# EAGLE board light_triggger_attiny44 (EAGLE 6.4)
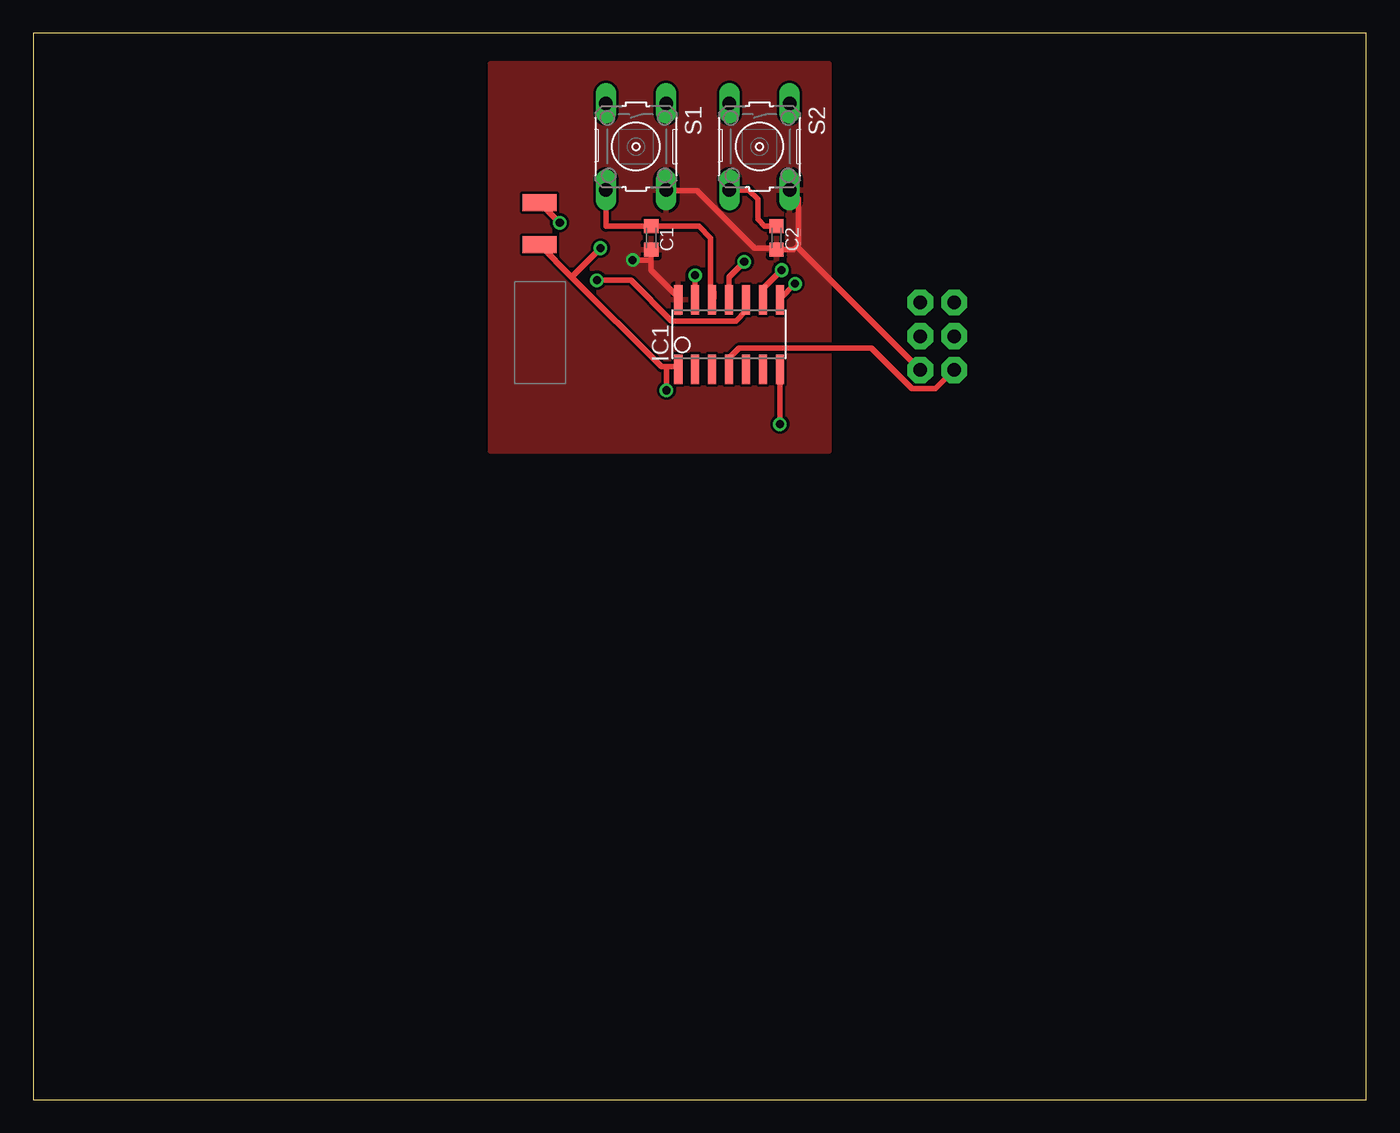
[diagram p0: board, top side]
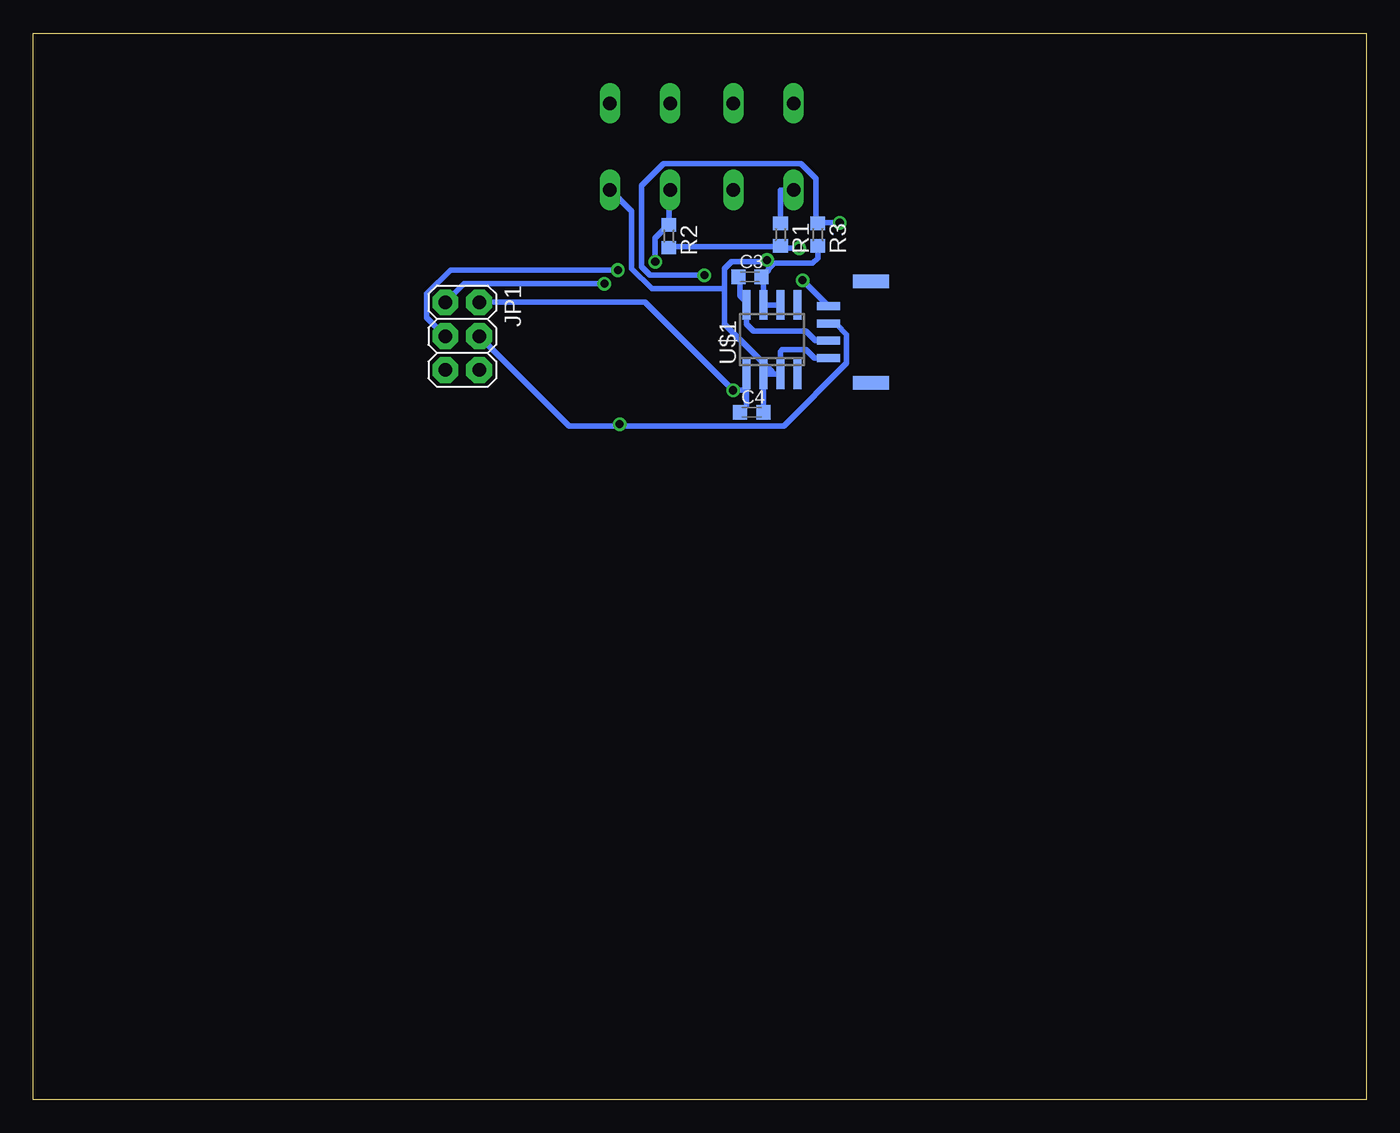
[diagram p1: board, bottom side, seen from below]

Size 100 x 80 mm. Coordinates in mm from the lower left corner, seen from the top.
Outline: 0,0 100,0 100,80 0,80 0,0
Copper layers (1*16): Top 0.035mm / dielectric 1.5mm / Bottom 0.035mm
Design rules "default *": minimum track width 16mil, minimum drill 24mil, track to track 8mil, track to pad 8mil, pad to pad 8mil, via to via 8mil, smd to smd 8mil, copper to edge 40mil, drill to drill 8mil, minimum pad ring 10mil, minimum via ring 8mil, stop-mask expansion 4mil, vias tented up to drill 0mil, thermal gap 10mil

## Footprints (pad centres in the part's own frame; a part is rotated, then mirrored left to right if it is on the bottom)
C0603K = smd 1.05 x 1.08: 1 -0.875,0; 2 0.875,0
SOIC14 = smd 0.61 x 2.21: 1 -3.81,-2.603; 2 -2.54,-2.603; 3 -1.27,-2.603; 4 0,-2.603; 5 1.27,-2.603; 6 2.54,-2.603; 7 3.81,-2.603; 8 3.81,2.603; 9 2.54,2.603; 10 1.27,2.603; 11 0,2.603; 12 -1.27,2.603; 13 -2.54,2.603; 14 -3.81,2.603
2X03 = drill 1.016 pad 1.93 octagon: 1 -2.54,-1.27; 2 -2.54,1.27; 3 0,-1.27; 4 0,1.27; 5 2.54,-1.27; 6 2.54,1.27
R0603 = smd 1 x 1.1: 1 -0.85,0; 2 0.85,0
B3F-10XX = drill 1.016 long: 1 -3.251,2.261; 2 3.251,2.261; 3 -3.251,-2.261; 4 3.251,-2.261
LM78L05 = smd 0.6 x 2.2: 1 -1.905,-2.6; 2 -0.635,-2.6; 3 0.635,-2.6; 4 1.905,-2.6; 5 1.905,2.6; 6 0.635,2.6; 7 -0.635,2.6; 8 -1.905,2.6
PHOTOTRANSITOR(OP525DA) = smd 2.54 x 1.27: P$1 -0.635,5.08; P$2 -0.635,1.905
SM04B-GHS-TB = smd 0.6 x 1.7: GND 2.42,4.66; PWMLED 5.02,4.66; TIMLED 6.32,4.66; VIN 3.72,4.66 | smd 1 x 2.7: P$2 0.57,1.46; P$4 8.17,1.46

## Placement (x,y rotation side)
C1  [C0603K]  46.35,64.64 270 top
C2  [C0603K]  55.75,64.64 270 top
C3  [C0603K]  46.23,61.72 0 bottom
C4  [C0603K]  46.1,51.56 0 bottom
IC1  ATTINY24/44/84-SSU  [SOIC14]  52.2,57.4 0 top
JP1  [2X03]  67.82,57.28 270 bottom
R1  [R0603]  43.94,64.9 270 bottom
R2  [R0603]  52.32,64.77 270 bottom
R3  [R0603]  41.15,64.9 270 bottom
S1  [B3F-10XX]  45.21,71.5 270 top
S2  [B3F-10XX]  54.48,71.5 270 top
U$1  LM78L05  [LM78L05]  44.58,57.02 0 bottom
U$2  0P525DA  [PHOTOTRANSITOR(OP525DA)]  37.34,69.22 180 top
U$3  SM04B-GHS-TB  [SM04B-GHS-TB]  35.69,53.21 90 bottom

## Library data of the parts
C1-C4 R1-R3 = resistor
IC1 = attiny24_44_84
JP1 = pinhead
S1 S2 = switch-omron; MPN: B3F-1000; OC_FARNELL: 176432; OC_NEWARK: 36M3542
U$1 = LM78L05
U$2 = OPTEK
U$3 = Wire-to-Board

## Nets
GND: C1.2 C2.2 C3.2 C4.2 IC1.14 JP1.6 R3.2 S1.2 S2.2 U$1.2 U$1.3 U$1.6 U$1.7 U$3.GND
MISO: IC1.8 JP1.1
MOSI: IC1.7 JP1.4 U$3.PWMLED
N$1: IC1.13 R3.1 U$2.P$2
N$2: IC1.10 U$3.TIMLED
N$3: C1.1 IC1.12 R1.1 S1.4
N$5: C2.1 IC1.11 R2.1 S2.4
RST: IC1.4 JP1.5
SCK: IC1.9 JP1.3
VCC: C4.1 IC1.1 JP1.2 R1.2 R2.2 U$1.1 U$2.P$1
VIN: C3.1 U$1.8 U$3.VIN

## Tracks (layer width: path | path; a pad name or v marks a point on that pad's centre or on a via)
GND  (via drill 0.61)
  Top 0.406: 57.28,64.01 57.04,63.77 C2.2 55.63,63.88 54.1,63.88 49.78,68.2 47.5,68.2 S1.2 | 57.28,64.01 57.4,64.14 57.4,67.59 S2.2 | 48.51,59.94 48.39,59.82 IC1.14 48.39,60.2 46.35,62.23 46.35,62.99 | 46.35,62.99 C1.2 | v44.96,62.99 46.35,62.99 | 57.28,64.01 JP1.6
  Bottom 0.406: U$3.GND 41.41,55.63 42.04,56.26 43.81,56.26 43.94,56.13 U$1.3 44.58,54.42 | 44.58,54.42 U$1.2 45.21,51.58 C4.2 | U$1.6 U$1.7 45.21,61.58 C3.2 44.83,62.24 44.83,62.36 44.58,62.61 | R3.2 41.15,63.12 41.53,62.74 44.45,62.74 44.58,62.61 | 44.58,62.61 v44.96,62.99 45.09,62.87 47.62,62.87 48.13,62.36 48.13,60.83 | 48.13,60.83 48.13,58.17 44.58,54.61 44.58,54.42 | 48.13,60.83 53.59,60.83 55.12,62.36 55.12,66.67 56.64,68.2 S2.2
  pour Top: 34.29,77.6 34.29,48.64 59.69,48.64 59.69,77.09 59.69,77.72 34.29,77.72
MISO  (via drill 0.61)
  Top 0.406: v57.15,61.21 56.01,60.07 IC1.8
  Bottom 0.406: v57.15,61.21 67.69,61.21 JP1.1
MOSI  (via drill 0.61)
  Top 0.406: v56.01,50.67 IC1.7
  Bottom 0.406: 56.01,50.55 59.82,50.55 JP1.4 | 56.01,50.55 43.69,50.55 38.99,55.24 38.99,57.4 39.75,58.17 40.26,58.17 U$3.PWMLED | v56.01,50.67 56.01,50.55
N$1  (via drill 0.61)
  Top 0.406: U$2.P$2 v39.5,65.79 | v49.66,61.85 IC1.13
  Bottom 0.406: v39.5,65.79 41.15,65.79 R3.1 41.27,65.91 41.27,69.09 42.42,70.23 52.7,70.23 54.36,68.58 54.36,62.48 53.72,61.85 v49.66,61.85
N$2  (via drill 0.61)
  Top 0.406: v42.29,61.47 44.83,61.47 47.88,58.42 52.7,58.42 53.47,59.18 IC1.10
  Bottom 0.406: v42.29,61.47 40.39,59.56 U$3.TIMLED
N$3
  Top 0.406: S1.4 42.95,65.52 C1.1 49.92,65.52 50.8,64.64 50.8,60.83 51.05,60.58 51.05,60.13 IC1.12
  Bottom 0.406: S1.4 43.94,68.25 R1.1
N$5  (via drill 0.61)
  Top 0.406: S2.4 53.67,68.25 54.36,67.56 54.36,66.04 54.86,65.53 55.74,65.53 C2.1 | IC1.11 52.2,61.72 v53.34,62.87
  Bottom 0.406: S2.4 52.32,68.15 R2.1 52.45,65.53 53.34,64.64 v53.34,62.87
RST
  Top 0.406: IC1.4 52.2,55.63 52.96,56.39 62.87,56.39 65.91,53.34 67.69,53.34 JP1.5
SCK  (via drill 0.61)
  Top 0.406: IC1.9 54.74,60.83 v56.13,62.23
  Bottom 0.406: v56.13,62.23 68.71,62.23 70.48,60.45 70.48,58.67 JP1.3
VCC  (via drill 0.61)
  Top 0.406: 48.39,54.86 IC1.1 48.26,54.99 47.5,54.99 | 47.5,54.99 47.12,54.99 40.39,61.72 | U$2.P$1 40.39,61.72 | 47.5,54.99 v47.5,53.21 | 40.39,61.72 v42.55,63.88
  Bottom 0.406: U$1.1 46.48,53.21 | 46.48,53.21 46.48,52.06 C4.1 | R2.2 52.32,64.01 43.94,64.01 R1.2 43.81,63.88 v42.55,63.88 | 46.48,53.21 v47.5,53.21 54.1,59.82 JP1.2
VIN
  Bottom 0.406: U$3.VIN 41.31,56.93 42.04,57.66 45.97,57.66 46.48,58.17 U$1.8 46.48,59.82 46.99,60.33 46.99,61.72 C3.1